# EAGLE board apex (EAGLE 5.09), part 1 of 2
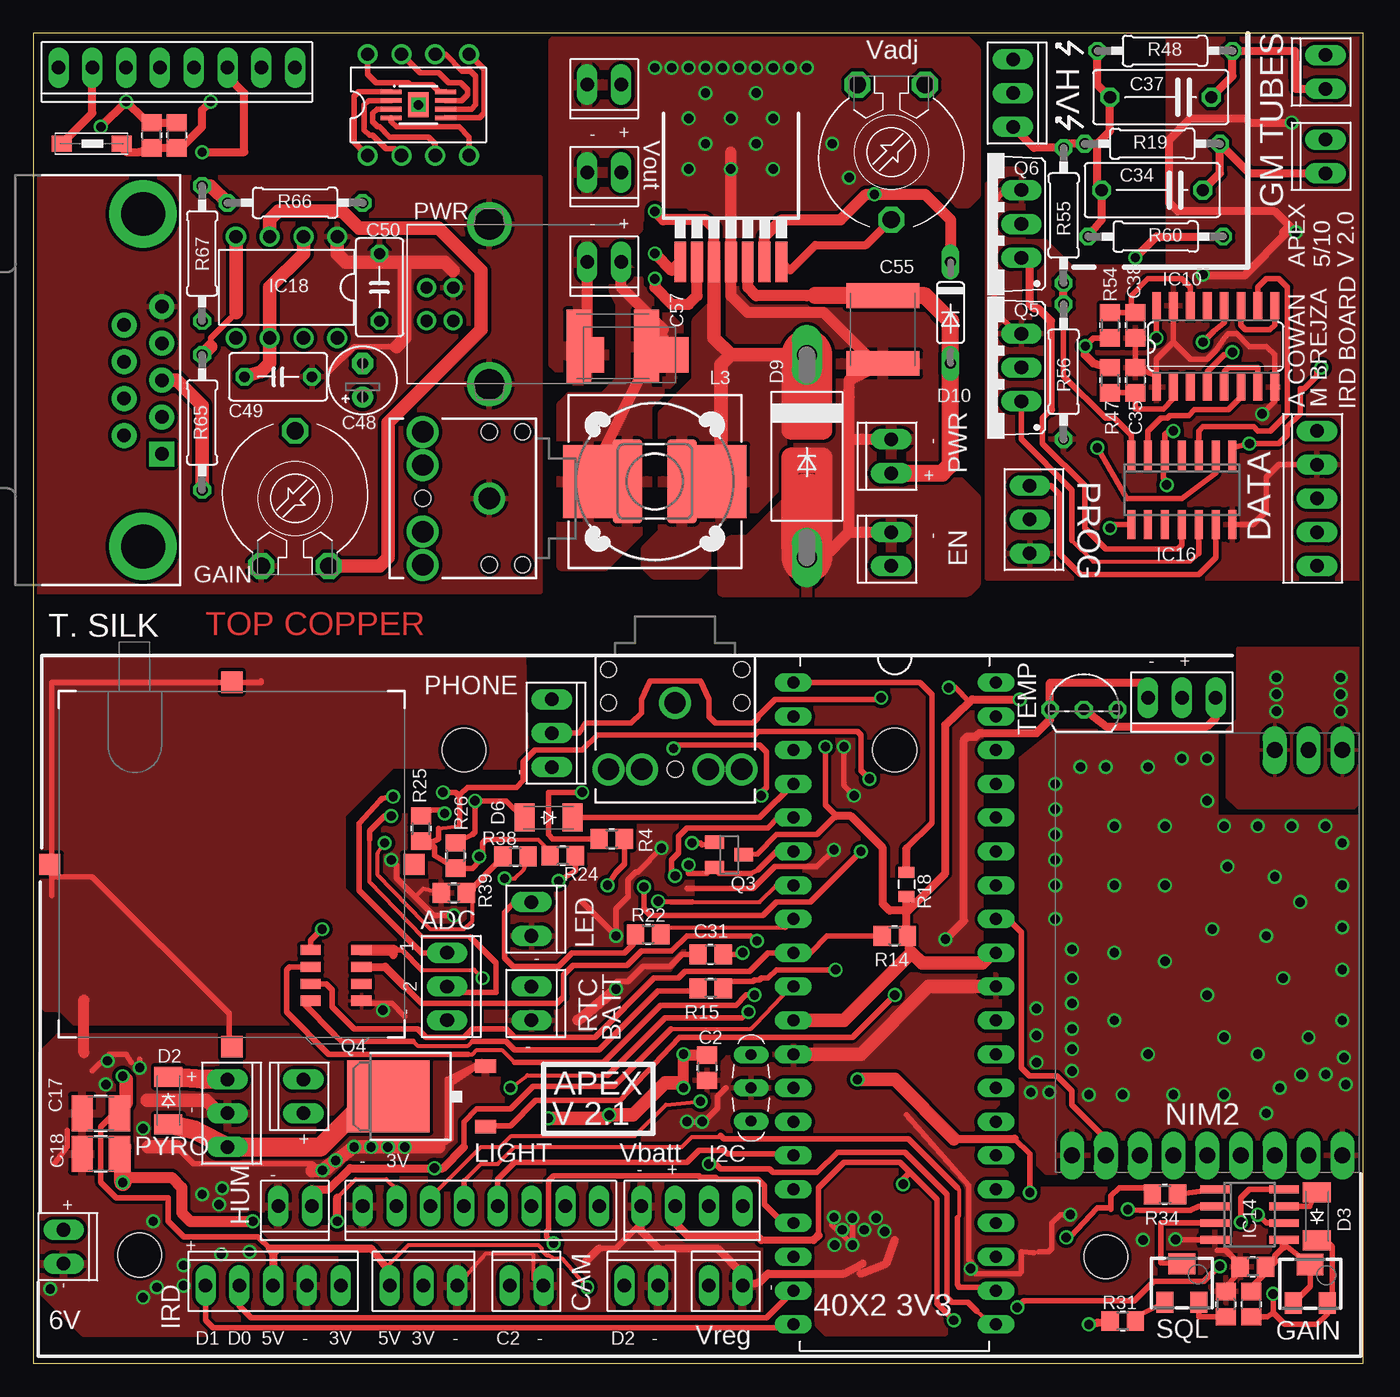
[diagram p0: board, top side]
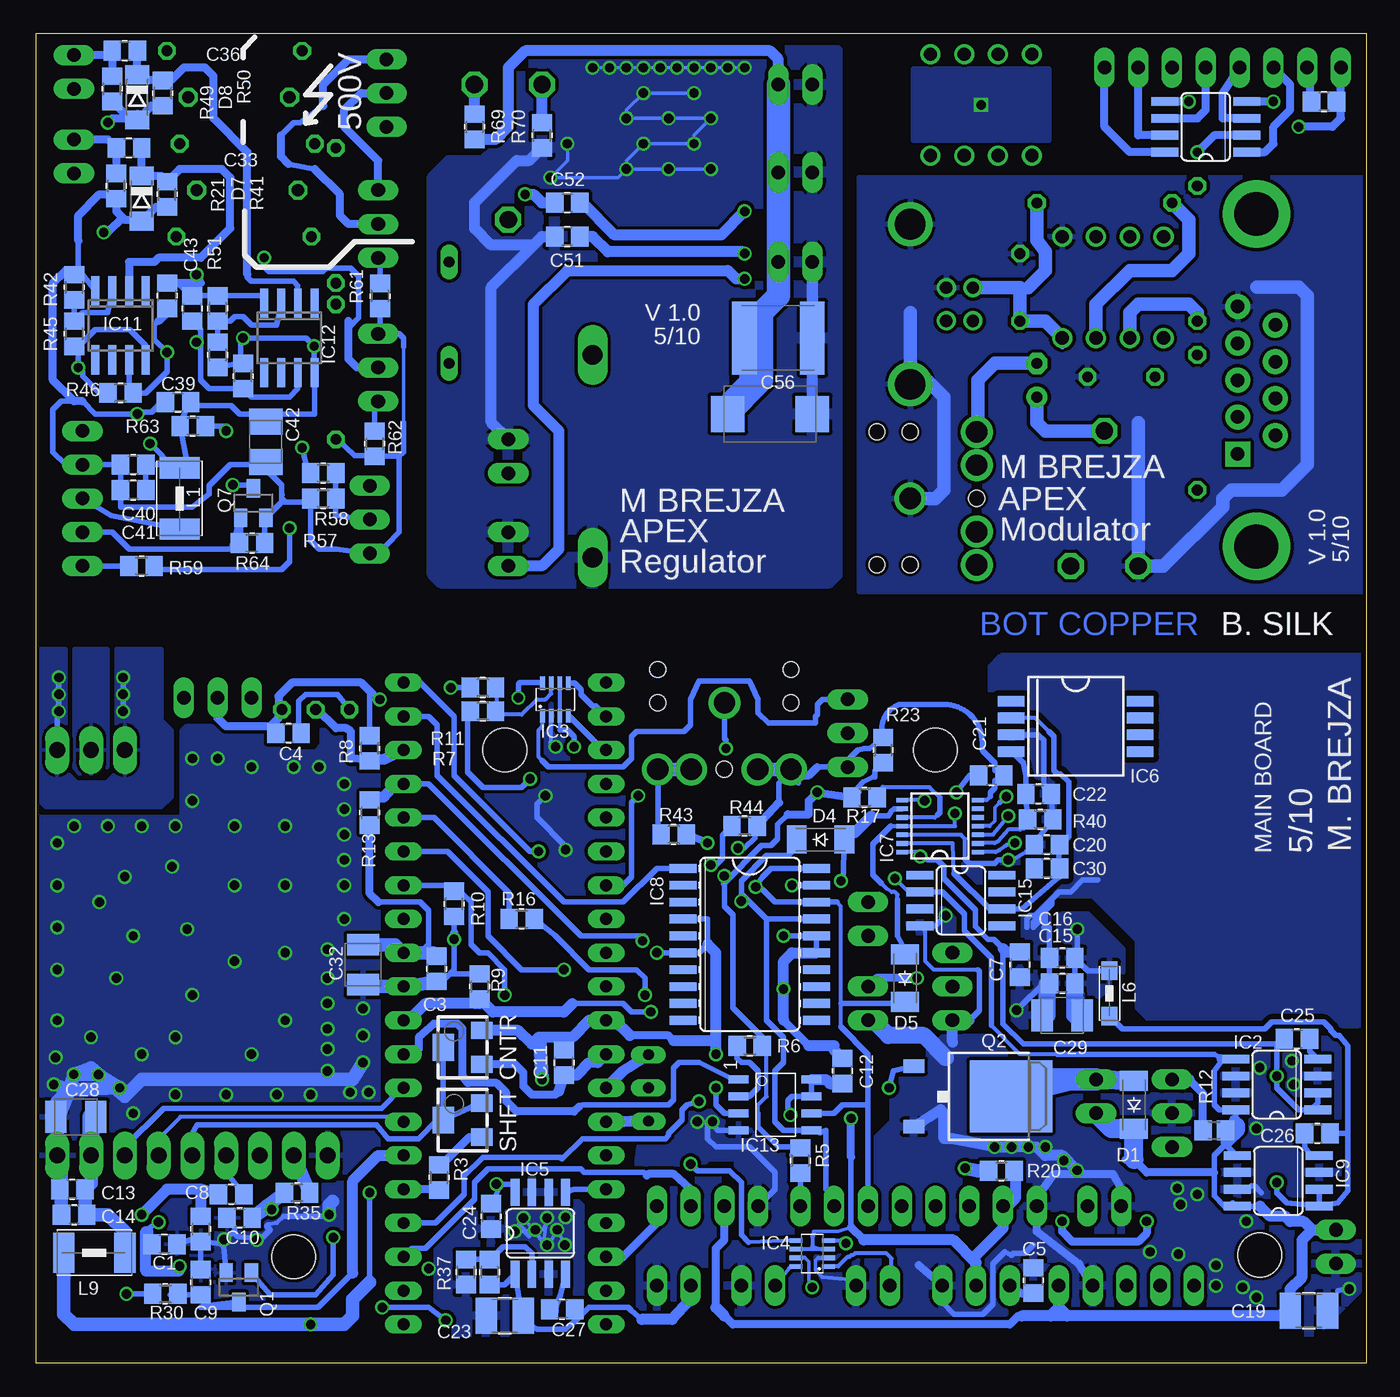
[diagram p1: board, bottom side, seen from below]

Size 100 x 100 mm. Coordinates in mm from the lower left corner, seen from the top.
Outline: 0,0 100,0 100,100 0,100 0,0
Copper layers (1*16): Top 0.035mm / dielectric 1.5mm / Bottom 0.035mm
Design rules "Fusion_eagle_rule_v1.1 *": minimum track width 6mil, minimum drill 12mil, track to track 8mil, track to pad 8mil, pad to pad 8mil, via to via 8mil, smd to smd 0mil, copper to edge 10mil, drill to drill 10mil, minimum pad ring 10mil, minimum via ring 6mil, stop-mask expansion 2mil, vias tented up to drill 30mil, thermal gap 10mil
Holes 3.3 mm at 32.38,46.1 64.77,46.1 80.64,8 8,8.13

## Footprints (pad centres in the part's own frame; a part is rotated, then mirrored left to right if it is on the bottom)
C0805 = smd 1.3 x 1.5: 1 -0.95,0; 2 0.95,0
C1210 = smd 1.6 x 2.7: 1 -1.4,0; 2 1.4,0
SMC_B = smd 1.6 x 2.4: + -1.5,0; - 1.5,0
C075-042X103 = drill 0.914 octagon: 1 -3.81,0; 2 3.81,0
B/3528-21R = smd 1.95 x 2.5: + 1.525,0; - -1.525,0
E2,5-5 = drill 0.813 pad 1.6 round: + -1.27,0 | drill 0.813 pad 1.6 octagon: - 1.27,0
C050-035X075 = drill 0.813 octagon: 1 -2.54,0; 2 2.54,0
C2220K = smd 1.85 x 5.5: 1 -2.55,0; 2 2.55,0
D/7343-31R = smd 2.55 x 2.7: + 3.175,0; - -3.175,0
SOD-123_MINI-SMA = smd 1.5 x 2.1: A 1.8,0; C -1.8,0
SOD80C = smd 1.4 x 1.8: A 1.7,0; C -1.7,0
C2673 = drill 1.499 long: A 7.62,0; C -7.62,0
DO35-7 = drill 0.813 long: A 3.81,0; C -3.81,0
MSOP8 = smd 0.35 x 1.6: 1 -0.975,-2.05; 2 -0.325,-2.05; 3 0.325,-2.05; 4 0.975,-2.05; 5 0.975,2.05; 6 0.325,2.05; 7 -0.325,2.05; 8 -0.975,2.05 | smd 1.89 x 1.57: EXP 0,0
TO92- = drill 0.813 octagon: 1 -2.54,0; 2 0,0; 3 2.54,0
SO08 = smd 0.66 x 2.032: 1 -1.905,-3.073; 2 -0.635,-3.073; 3 0.635,-3.073; 4 1.905,-3.073; 5 1.905,3.073; 6 0.635,3.073; 7 -0.635,3.073; 8 -1.905,3.073
SOT23-8L = smd 0.35 x 1: 1 -0.975,-1.225; 2 -0.325,-1.225; 3 0.325,-1.225; 4 0.975,-1.225; 5 0.975,1.225; 6 0.325,1.225; 7 -0.325,1.225; 8 -0.975,1.225
SO8-7_5 = smd 0.8 x 2: 1 -1.905,-4.845; 2 -0.635,-4.845; 3 0.635,-4.845; 4 1.905,-4.845; 5 1.905,4.845; 6 0.635,4.845; 7 -0.635,4.845; 8 -1.905,4.845
TSSOP14 = smd 0.9 x 0.35: 1 -2.875,1.95; 2 -2.875,1.3; 3 -2.875,0.65; 4 -2.875,0; 5 -2.875,-0.65; 6 -2.875,-1.3; 7 -2.875,-1.95; 8 2.825,-1.95; 9 2.825,-1.3; 10 2.825,-0.65; 11 2.825,0; 12 2.825,0.65; 13 2.825,1.3; 14 2.825,1.95
SO20W = smd 0.66 x 2.032: 1 -5.715,-5.029; 2 -4.445,-5.029; 3 -3.175,-5.029; 4 -1.905,-5.029; 5 -0.635,-5.029; 6 0.635,-5.029; 7 1.905,-5.029; 8 3.175,-5.029; 9 4.445,-5.029; 10 5.715,-5.029; 11 5.715,5.029; 12 4.445,5.029; 13 3.175,5.029; 14 1.905,5.029; 15 0.635,5.029; 16 -0.635,5.029; 17 -1.905,5.029; 18 -3.175,5.029; 19 -4.445,5.029; 20 -5.715,5.029
SO16 = smd 0.66 x 2.032: 1 -4.445,-3.073; 2 -3.175,-3.073; 3 -1.905,-3.073; 4 -0.635,-3.073; 5 0.635,-3.073; 6 1.905,-3.073; 7 3.175,-3.073; 8 4.445,-3.073; 9 4.445,3.073; 10 3.175,3.073; 11 1.905,3.073; 12 0.635,3.073; 13 -0.635,3.073; 14 -1.905,3.073; 15 -3.175,3.073; 16 -4.445,3.073
SO08' = smd 0.6 x 2.2: 1 -1.905,-2.6; 2 -0.635,-2.6; 3 0.635,-2.6; 4 1.905,-2.6; 5 1.905,2.6; 6 0.635,2.6; 7 -0.635,2.6; 8 -1.905,2.6
SO8 = smd 0.61 x 1.524: 1 -1.27,-2.743; 2 0,-2.743; 3 1.27,-2.743; 4 2.54,-2.743; 5 2.54,2.743; 6 1.27,2.743; 7 0,2.743; 8 -1.27,2.743
SO-14 = smd 0.6 x 2.2: 1 -3.81,-2.6; 2 -2.54,-2.6; 3 -1.27,-2.6; 4 0,-2.6; 5 1.27,-2.6; 6 2.54,-2.6; 7 3.81,-2.6; 8 3.81,2.6; 9 2.54,2.6; 10 1.27,2.6; 11 0,2.6; 12 -1.27,2.6; 13 -2.54,2.6; 14 -3.81,2.6
DIL08 = drill 1 round: 1 -3.81,-3.81; 2 -1.27,-3.81; 3 1.27,-3.81; 4 3.81,-3.81; 5 3.81,3.81; 6 1.27,3.81; 7 -1.27,3.81; 8 -3.81,3.81
DDPACK-7 = smd 0.889 x 3.048: 1 -3.81,-8.255; 2 -2.54,-8.255; 3 -1.27,-8.255; 4 0,-8.255; 5 1.27,-8.255; 6 2.54,-8.255; 7 3.81,-8.255
10X08MTA = drill 1.016 long: 1 8.89,0; 2 6.35,0; 3 3.81,0; 4 1.27,0; 5 -1.27,0; 6 -3.81,0; 7 -6.35,0; 8 -8.89,0
10X05MTA = drill 1.016 long: 1 5.08,0; 2 2.54,0; 3 0,0; 4 -2.54,0; 5 -5.08,0
10X03MTA = drill 1.016 long: 1 2.54,0; 2 0,0; 3 -2.54,0
10X02MTA = drill 1.016 long: 1 1.27,0; 2 -1.27,0
10X04MTA = drill 1.016 long: 1 3.81,0; 2 1.27,0; 3 -1.27,0; 4 -3.81,0
1812 = smd 1.6 x 3: 1 -2.3,0; 2 2.3,0
1806 = smd 1.5 x 1.2: 1 -2.3,0; 2 2.2,0
POWER-CHOKE_WE-TPC = smd 6.3 x 2.2: 1 0,2.05; 2 0,-2.05
DR127 = smd 3.85 x 5.5: 1 -4.975,0; 2 4.975,0
1210 = smd 1.4 x 1.2: 1 -1.7,0; 2 1.7,0
DIL40 = drill 0.9 long: 1 -21.59,-8.89; 2 -19.05,-8.89; 3 -16.51,-8.89; 4 -13.97,-8.89; 5 -11.43,-8.89; 6 -8.89,-8.89; 7 -6.35,-8.89; 8 -3.81,-8.89; 9 -1.27,-8.89; 10 1.27,-8.89; 11 3.81,-8.89; 12 6.35,-8.89; 13 8.89,-8.89; 14 11.43,-8.89; 15 13.97,-8.89; 16 16.51,-8.89; 17 19.05,-8.89; 18 21.59,-8.89; 19 24.13,-8.89; 20 26.67,-8.89; 21 26.67,6.35; 22 24.13,6.35; 23 21.59,6.35; 24 19.05,6.35; 25 16.51,6.35; 26 13.97,6.35; 27 11.43,6.35; 28 8.89,6.35; 29 6.35,6.35; 30 3.81,6.35; 31 1.27,6.35; 32 -1.27,6.35; 33 -3.81,6.35; 34 -6.35,6.35; 35 -8.89,6.35; 36 -11.43,6.35; 37 -13.97,6.35; 38 -16.51,6.35; 39 -19.05,6.35; 40 -21.59,6.35
SOT23 = smd 1 x 1.4: 1 -0.95,-1.1; 2 0.95,-1.1; 3 0,1.1
DPACK_1 = smd 1 x 1.6: B -2.28,-4.8; E 2.28,-4.8 | smd 5.4 x 6.2: C 0,2.5
TO220BV = drill 1.016 long: D 0,-2.54; G -2.54,-2.54; S 2.54,-2.54
RTRIM3214W = smd 1.3 x 1.6: 1 -1.275,-1.45; 3 1.275,-1.45 | smd 2 x 1.6: 2 0,1.45
R0805 = smd 1.3 x 1.5: 1 -0.95,0; 2 0.95,0
R0805' = smd 1.3 x 1.5: 1 -0.85,0; 2 0.85,0
0805 = smd 0.8 x 1.2: 1 -0.9,0; 2 0.9,0
0207/10 = drill 0.813 octagon: 1 -5.08,0; 2 5.08,0
PT-10 = drill 1.3 octagon: 1 -2.54,-5.08; 2 2.54,-5.08; 3 0,5.08
LASSEN_IQ_GPS = smd 0.762 x 1.524: 1 2.752,7.076; 2 2.752,3.266; 3 4.022,7.076; 4 4.022,3.266; 5 5.292,7.076; 6 5.292,3.266; 7 6.562,7.076; 8 6.562,3.266 | smd 1.6 x 1.6: GND1 -0.7,13; GND2 13,26.7; GND3 26.7,13; GND4 13,-0.7
CSTLS_G8 = drill 0.813 long: 1 -2.5,0; 2 0,0; 3 2.5,0
AUDIO-JACK = drill 1.6 round: 1 0,0; 2 5,5; 3 5,2.5; 4 5,-2.5; 5 5,-5 | hole 1.2: 0,5; -2.5,5; -2.5,-5; 0,-5; 5,0
NIM2PK = drill 1.2 long: 1 -15.24,5.08; 2 -15.24,2.54; 3 -15.24,0; 10 15.24,-15.24; 11 15.24,-12.7; 12 15.24,-10.16; 13 15.24,-7.62; 14 15.24,-5.08; 15 15.24,-2.54; 16 15.24,0; 17 15.24,2.54; 18 15.24,5.08
DB9 = drill 1.016 pad 1.88 square: 1 -5.54,-1.42 | drill 1.016 pad 1.88 round: 2 -2.77,-1.42; 3 0,-1.42; 4 2.77,-1.42; 5 5.54,-1.42; 6 -4.15,1.42; 7 -1.38,1.42; 8 1.38,1.42; 9 4.15,1.42 | drill 3.302 pad 5.08 round: G1 -12.5,0; G2 12.5,0
85-32004-10X = drill 0.92 pad 1.27 round: 1 4.71,-1.25; 2 4.71,1.25; 3 2.71,1.25; 4 2.71,-1.25 | drill 2.3 pad 3 round: M1 0,6.02; M2 0,-6.02

## Placement (x,y rotation side)
C1  100n  [C0805]  90.36,8.95 180 bottom
C2  100n  [C0805]  50.67,22.23 90 top
C3  100n  [C0805]  69.91,29.65 90 bottom
C4  100n  [C0805]  81.03,47.37 180 bottom
C5  100n  [C0805]  25.02,6.22 270 bottom
C6  47n  [C0805]  91.57,4.45 270 top
C7  100n  [C0805]  26.04,29.97 90 bottom
C8  47n  [C0805]  85.34,12.7 0 bottom
C9  47n  [C0805]  87.63,6.1 270 bottom
C10  47n  [C0805]  84.71,10.92 0 bottom
C11  100n  [C0805]  60.33,22.61 90 bottom
C12  100n  [C0805]  39.37,21.97 270 bottom
C13  100n  [C0805]  97.28,13.08 0 bottom
C14  100p  [C0805]  97.16,11.18 0 bottom
C15  100n  [C0805]  22.86,28.57 0 bottom
C16  100p  [C0805]  22.86,30.48 0 bottom
C17  [C1210]  5.08,18.8 180 top
C18  22u  [C1210]  5.08,15.75 180 top
C19  [C1210]  4.32,3.94 0 bottom
C20  [C0805]  24,38.99 180 bottom
C21  [C0805]  28.19,44.2 0 bottom
C22  47p  [C0805]  24.64,42.8 0 bottom
C23  22u  [C1210]  64.77,3.56 180 bottom
C24  1u  [C0805]  65.79,11.05 90 bottom
C25  10n  [C0805]  5.21,24.38 0 bottom
C26  10n  [C0805]  3.68,17.27 180 bottom
C27  10n  [C0805]  60.45,4.06 180 bottom
C28  [SMC_B]  97.03,18.54 180 bottom
C29  [SMC_B]  22.86,26.16 180 bottom
C30  10n  [C0805]  24,37.21 0 bottom
C31  100n  [C0805]  50.93,30.73 0 top
C32  [SMC_B]  75.44,29.97 270 bottom
C33  [C0805]  93.03,91.38 0 bottom
C34  [C075-042X103]  84.14,88.2 180 top
C35  [C0805]  82.87,73.91 90 top
C36  [C0805]  93.34,98.68 0 bottom
C37  [C075-042X103]  84.77,95.19 180 top
C38  [C0805]  82.87,78.04 270 top
C39  [C0805]  89.34,72.26 0 bottom
C40  [C0805]  92.71,67.56 0 bottom
C41  [C0805]  92.71,65.66 0 bottom
C42  [B/3528-21R]  82.74,69.28 90 bottom
C43  [C0805]  88.27,79.31 270 bottom
C44  [C0805]  90.17,80.26 270 bottom
C45  [C0805]  8.89,92.33 90 top
C46  [C0805]  10.79,92.33 90 top
C47  [C0805]  3.17,94.87 0 bottom
C48  [E2,5-5]  24.77,73.91 90 top
C49  [C050-035X075]  18.41,74.17 180 top
C50  [C050-035X075]  26.04,80.9 270 top
C51  [C0805]  60.07,84.71 180 bottom
C52  [C0805]  60.07,87.25 0 bottom
C53  [C2220K]  44.2,77.09 0 bottom
C54  [C2220K]  43.56,76.45 180 top
C55  [C2220K]  63.88,77.72 270 top
C56  [D/7343-31R]  44.83,71.37 180 bottom
C57  [D/7343-31R]  44.83,75.82 0 top
D1  CGRM4002-G  [SOD-123_MINI-SMA]  17.46,19.43 90 bottom
D2  CGRM4002-G  [SOD-123_MINI-SMA]  10.16,19.75 270 top
D3  CGRM4002-G  [SOD-123_MINI-SMA]  96.52,11.05 90 top
D4  CGRM4002-G  [SOD-123_MINI-SMA]  41.02,39.37 0 bottom
D5  CGRM4002-G  [SOD-123_MINI-SMA]  34.67,28.96 90 bottom
D6  CGRM4002-G  [SOD-123_MINI-SMA]  38.73,41.02 180 top
D7  PMLL4150  [SOD80C]  92.08,87.57 270 bottom
D8  PMLL4150  [SOD80C]  92.39,95.19 270 bottom
D9  MBRS130LT3  [C2673]  58.17,68.2 270 top
D10  1N4148DO35-7  [DO35-7]  68.96,78.99 270 top
E$1  [MSOP8]  28.96,94.61 270 top
IC1  DS18B20  [TO92-]  78.99,49.15 0 top
IC2  LT1763  [SO08]  6.73,20.95 90 bottom
IC3  MAX3373E  [SOT23-8L]  60.96,49.91 0 bottom
IC4  MAX3373E  [SOT23-8L]  41.66,8.26 90 bottom
IC5  LT1763  [SO08]  62.1,9.78 0 bottom
IC6  MPX6115  [SO8-7_5]  21.84,47.88 270 bottom
IC7  MCP3204  [TSSOP14]  32.07,40.39 180 bottom
IC8  DS3234  [SO20W]  46.35,31.5 270 bottom
IC9  LT1763  [SO08]  6.6,13.72 90 bottom
IC10  4528D  [SO16]  88.9,76.45 0 top
IC11  LM311D  [SO08']  93.66,78.04 180 bottom
IC12  LM311D  [SO08']  80.96,77.09 180 bottom
IC13  FM25-S  [SO8]  44.45,20.07 270 bottom
IC14  CA3240ED  [SO08']  91.44,11.18 270 top
IC15  MAX6133  [SO08]  30.48,34.8 270 bottom
IC16  PICAXE-14MSO  [SO-14]  86.36,65.66 180 top
IC17  TCS230  [SO08]  12.06,92.96 90 bottom
IC18  NE555N  [DIL08]  19.05,80.9 180 top
IC19  LT1959R  [DDPACK-7]  52.45,91.06 0 top
IC20  NE555N  [DIL08]  28.96,94.61 0 top
J1  [10X08MTA]  33.66,11.81 180 top
J2  [10X05MTA]  18.03,5.84 0 top
J3  [10X03MTA]  86.36,50.04 180 top
J4  [10X03MTA]  14.61,18.8 270 top
J5  [10X02MTA]  20.32,20.07 90 top
J6  [10X02MTA]  37.47,27.05 270 top
J7  [10X03MTA]  38.99,47.37 270 top
J8  [10X02MTA]  45.72,5.84 0 top
J9  [10X02MTA]  37.08,5.84 0 top
J10  [10X02MTA]  37.47,33.4 270 top
J11  [10X02MTA]  52.07,5.84 0 top
J12  [10X02MTA]  19.68,11.81 180 top
J13  [10X02MTA]  2.29,8.76 270 top
J14  [10X03MTA]  29.34,5.84 0 top
J15  [10X04MTA]  49.53,11.81 180 top
J16  [10X02MTA]  97.16,90.74 90 top
J17  [10X02MTA]  97.16,97.09 90 top
J18  [10X03MTA]  31.11,28.32 270 top
J19  [10X03MTA]  73.66,95.5 270 top
J20  [10X03MTA]  74.93,63.44 270 top
J21  [10X05MTA]  96.52,65.02 90 top
J22  [10X08MTA]  10.79,97.41 180 top
J24  [10X02MTA]  42.93,89.53 180 top
J25  [10X02MTA]  42.93,82.8 180 top
J26  [10X02MTA]  64.52,68.2 90 top
J27  [10X02MTA]  64.52,61.21 90 top
J28  [10X02MTA]  42.93,96.14 180 top
L1  [1812]  89.22,65.02 270 bottom
L2  [1806]  4.45,91.69 0 top
L3  [POWER-CHOKE_WE-TPC]  46.74,66.29 270 top
L4  DR127  [DR127]  46.74,66.29 180 top
L6  [1210]  19.3,27.81 90 bottom
L9  [1812]  95.63,8.32 180 bottom
PIC1  PICAXE40X2  [DIL40]  66.04,29.59 270 top
Q1  BCX70SMD  [SOT23]  84.77,5.71 180 bottom
Q2  IRF740DPACK  [DPACK_1]  29.21,20.07 270 bottom
Q3  BCX70SMD  [SOT23]  52.32,38.23 270 top
Q4  IRF740DPACK  [DPACK_1]  29.21,20.07 90 top
Q5  IRF512  [TO220BV]  71.75,74.87 90 top
Q6  IRF512  [TO220BV]  71.75,85.66 90 top
Q7  BSS123  [SOT23]  83.67,64.67 0 bottom
R1  100K  [RTRIM3214W]  67.94,23.75 90 bottom
R2  100K  [RTRIM3214W]  67.94,18.29 90 bottom
R3  10K  [R0805]  69.72,13.97 270 bottom
R4  100  [R0805]  43.5,39.43 0 top
R5  100  [R0805]  42.55,15.24 270 bottom
R6  100  [R0805]  46.35,23.88 0 bottom
R7  0  [R0805]  66.42,49.02 180 bottom
R8  4k7  [R0805]  74.93,46.23 90 bottom
R9  100k  [R0805]  66.67,28.32 270 bottom
R10  100k  [R0805]  68.58,34.54 90 bottom
R11  0  [R0805]  66.42,50.8 180 bottom
R12  1k  [R0805']  11.43,17.53 0 bottom
R13  100k  [R0805]  74.93,41.4 270 bottom
R14  100k  [R0805]  64.77,32.13 0 top
R15  1k  [R0805]  50.93,28.19 180 top
R16  1k  [R0805]  63.5,33.4 0 bottom
R17  51k  [R0805]  37.72,42.55 0 bottom
R18  10K  [0805]  65.66,36 270 top
R19  [0207/10]  84.14,91.69 180 top
R20  22K  [R0805]  27.43,14.48 0 bottom
R21  [R0805]  93.98,88.52 90 bottom
R22  1k  [R0805]  46.23,32.26 0 top
R23  33k  [R0805]  36.32,46.1 270 bottom
R24  10k  [R0805]  39.81,38.16 180 top
R25  10k  [R0805]  29.15,40.2 270 top
R26  10k  [R0805]  31.75,38.16 270 top
R27  100K  [RTRIM3214W]  96.01,5.97 0 top
R28  1K5  [R0805]  87.63,10.1 270 bottom
R29  1K  [R0805]  91.69,7.24 180 top
R30  10K  [R0805]  90.3,5.21 180 bottom
R31  10K  [R0805]  81.92,3.17 180 top
R32  10K  [R0805]  89.66,4.45 270 top
R33  100K  [RTRIM3214W]  86.36,6.03 0 top
R34  4K7  [R0805]  85.09,12.7 0 top
R35  10K  [R0805]  80.39,12.83 180 bottom
R36  22K  [R0805]  65.91,6.86 270 bottom
R37  22K  [R0805]  67.69,6.86 90 bottom
R38  4K7  [R0805]  36.26,38.1 0 top
R39  4K7  [R0805]  31.62,35.37 0 top
R40  51K  [R0805]  24.51,40.89 0 bottom
R41  [R0805]  90.17,87.88 90 bottom
R42  [R0805]  97.16,80.9 270 bottom
R43  10K  [R0805]  52.07,39.75 180 bottom
R44  10K  [R0805]  46.74,40.39 180 bottom
R45  [R0805]  97.16,77.41 270 bottom
R46  [R0805]  93.66,72.96 180 bottom
R47  [R0805]  80.96,73.91 90 top
R48  [0207/10]  85.09,98.68 180 top
R49  [R0805]  94.3,95.82 90 bottom
R50  [R0805]  90.49,95.5 90 bottom
R51  [R0805]  86.36,79.31 270 bottom
R52  [R0805]  86.36,75.82 270 bottom
R53  [R0805]  84.45,74.23 90 bottom
R54  [R0805]  80.96,78.04 270 top
R55  [0207/10]  77.47,86.3 90 top
R56  [0207/10]  77.47,74.55 90 top
R57  [R0805]  78.42,65.02 0 bottom
R58  [R0805]  78.42,66.93 0 bottom
R59  [R0805]  92.08,59.94 0 bottom
R60  [0207/10]  84.39,84.71 180 top
R61  [R0805]  74.16,80.24 270 bottom
R62  [R0805]  74.56,69.14 270 bottom
R63  [R0805]  88.22,70.45 0 bottom
R64  [R0805]  83.77,61.67 0 bottom
R65  1K  [0207/10]  12.7,70.74 270 top
R66  [0207/10]  19.68,87.25 180 top
R67  [0207/10]  12.7,83.44 270 top
R68  [PT-10]  19.68,65.02 0 top
R69  [R0805]  67.06,92.96 270 bottom
R70  [R0805]  61.98,92.33 90 bottom
R71  [PT-10]  64.52,91.06 180 top
U$1  LASSEN_IQ_GPSLASSEN  [LASSEN_IQ_GPS]  27.94,24.51 90 top
U$2  RESONATOR_4M  [CSTLS_G8]  53.98,20.7 270 top
U$3  AUDIO-JACK2  [AUDIO-JACK]  48.26,49.66 270 top
U$4  AUDIO-JACKPTH  [AUDIO-JACK]  34.29,65.02 180 top
X1  NIM2  [NIM2PK]  93.34,30.86 270 top
X2  [DB9]  8.26,73.91 90 top
X3  MINI-USB_SHIELD4P-85-32004-10X  [85-32004-10X]  34.29,79.63 180 top

## Library data of the parts
C1-C57 L3 R3-R11 R13-R17 R19-R26 R28-R32 R34-R71 = rcl
D1-D10 = diode
E$1 IC2-IC9 IC15-IC17 IC19 PIC1 Q2 Q4 U$2 X1 = Mine
IC1 = 1wire
IC10 = 45xx
IC11 IC12 IC14 IC18 IC20 = linear
IC13 = ramtron-2
J1-J22 J24-J28 = con-amp
L1 L2 L6 L9 = wuerth-elektronik
L4 = inductors
Q1 Q3 = transistor-npn
Q5 Q6 = transistor-power
Q7 = transistor-small-signal
R1 R2 R12 R27 R33 = resistor
R18 U$1 U$3 U$4 X2 = SparkFun
X3 = con-cypressindustries

## Nets
1WIRE: IC1.2 J3.3 PIC1.38 R8.1
+3V3: C2.2 C3.2 C4.2 C11.2 C12.2 C18.1 C26.1 C31.2 C32.+ IC1.3 IC3.3 IC3.6 IC4.3 IC4.6 IC8.4 IC8.6 IC9.1 IC9.2 IC13.3 IC13.7 IC13.8 J1.2 J3.2 J14.2 L6.1 L9.2 PIC1.11 PIC1.32 Q3.3 R1.3 R8.2 R11.2 R13.2 R14.2 R18.2 R20.2 R31.2
+5V: C5.2 C7.2 C17.1 C21.1 C25.1 IC2.1 IC2.2 IC4.7 IC7.14 J2.3 J14.3 R7.2 R24.2 R25.2 R26.2
+5V1: C39.2 C40.2 C41.2 C42.+ IC10.16 IC11.8 IC12.8 IC16.1 L1.1 R45.2 R46.2 R47.2 R52.2 R53.2 R54.2 R63.1
+12V: C1.2 C19.1 C24.2 D1.C IC2.5 IC2.8 IC5.8 IC9.5 IC9.8 IC14.8 IC15.2 J2.1 J5.2 J13.2 J15.2 R12.2 R38.2
+500V: C34.2 C37.2 J19.1 R19.2 R48.2 R55.2 R60.2
ADCCS: D6.C PIC1.4
AGND: C45.2 C46.2 C47.2 IC17.4 J22.1
AUX1: J15.4 PIC1.18
AUX2: J15.3 PIC1.23
CHDK1: IC4.5 PIC1.21
CHDK2: IC4.4 PIC1.17
CLK: D5.C IC8.18 IC8.20 IC13.6 J1.6 PIC1.40
DDV: D6.A IC7.8 R26.1
GND: C1.1 C2.1 C3.1 C4.1 C5.1 C7.1 C9.1 C10.1 C11.1 C12.1 C13.1 C14.1 C15.1 C16.1 C17.2 C18.2 C19.2 C20.2 C21.2 C22.2 C23.2 C24.1 C28.- C29.- C31.1 C32.- IC1.1 IC2.3 IC2.6 IC2.7 IC3.2 IC4.2 IC5.3 IC5.6 IC5.7 IC6.3 IC7.7 IC7.12 IC8.15 IC8.16 IC9.3 IC9.6 IC9.7 IC13.4 IC14.4 IC15.4 J1.1 J2.2 J3.1 J4.2 J6.1 J7.1 J8.1 J9.1 J10.1 J11.1 J12.1 J13.1 J14.1 J15.1 J18.1 PIC1.12 PIC1.31 Q1.2 Q2.E Q4.E R1.1 R9.1 R10.1 R23.1 R28.2 R29.2 R32.1 R37.1 R39.1 R40.2 R44.1 U$1.2 U$2.2 U$3.4 U$3.5 X1.10 X1.18
GND1: C35.2 C38.2 C39.1 C40.1 C41.1 C42.- C43.1 C44.1 D7.A D8.A IC10.1 IC10.8 IC10.15 IC11.4 IC12.4 IC16.14 J19.2 J20.1 J21.2 Q5.S Q6.S Q7.2 R21.1 R41.1 R42.1 R49.1 R50.1 R51.1 R56.1 R57.1 R61.2 R62.2 R64.2
GND2: C49.1 C50.1 IC18.1 R68.1 U$4.1 X2.5 X3.4 X3.M1 X3.M2
GND3: C51.2 C53.2 C54.2 C55.2 C56.- C57.- D9.A IC19.4 J24.1 J25.1 J26.1 J27.1 J28.1 R70.1
IRD1: J2.4 PIC1.19
IRD2: J2.5 PIC1.20
LED: PIC1.8 R22.2
MEMCS: IC13.1 PIC1.29
MISO: PIC1.5 R4.1 R5.1 R6.2 R17.1 R23.2
MOSI: D4.C IC8.17 IC13.5 J1.7 PIC1.7 U$3.1
N$1: R16.2 U$1.5
N$2: IC8.19 R4.2
N$3: R15.2 U$1.1
N$4: J1.8 R5.2
N$5: IC13.2 R6.1
N$6: IC7.10 R17.2
N$7: IC3.7 R7.1 R11.1
N$8: PIC1.1 R18.1
N$9: PIC1.14 U$2.3
N$10: PIC1.13 U$2.1
N$11: R43.2 U$3.2 U$3.3
N$12: IC4.1 J9.2
N$13: X1.2
N$14: C25.2 IC2.4
N$15: C26.2 IC9.4
N$16: C20.1 C30.2 IC6.2 IC7.13 IC15.6
N$17: IC4.8 J8.2
N$18: R1.2 R2.2 R2.3 X1.14
N$19: J10.2 R22.1
N$20: IC3.8 J7.2
N$21: C30.1
N$22: D5.A IC7.11 R25.1
N$23: IC3.1 J7.3
N$24: D1.A J5.1 Q2.C
N$25: C27.2 IC5.4
N$26: D4.A IC7.9 R24.1
N$27: IC5.2 R36.1 R37.2
N$28: D2.A J4.1 Q4.C
N$29: D2.C J4.3 R12.1
N$30: J6.2 U$1.8
N$31: IC7.3 J18.2
N$32: IC7.4 J18.3
N$33: C23.1 C27.1 IC5.1 J11.2 R36.2
N$34: C22.1 IC6.4 IC7.2 R40.1
N$35: C13.2 C14.2 C28.+ L9.1 X1.17
N$36: IC10.5 IC10.7
N$37: C8.2 X1.13
N$38: C8.1 IC14.6 R28.1
N$39: C6.1 IC14.5 R27.1 R27.2 R29.1
N$40: D3.A IC14.7
N$41: C6.2 D3.C R27.3 R30.2
N$42: R31.1 R33.1
N$43: C15.2 C16.2 C29.+ L6.2 U$1.7
N$44: R32.2 R33.3
N$45: IC14.3 R33.2
N$46: R2.1 R3.1
N$47: Q1.1 R34.1
N$48: IC14.1 R34.2
N$49: C10.2 IC14.2 R35.2
N$50: J12.2 PIC1.10 R20.1
N$51: C34.1 J16.2 R19.1
N$52: C33.1 J16.1 R21.2
N$53: C33.2 D7.C IC11.2 R41.2
N$54: IC11.3 R42.2 R45.1
N$55: C44.2 IC10.4 IC11.7 R46.1
N$56: C35.1 IC10.2 R47.1
N$57: IC10.9 IC10.11
N$58: C37.1 J17.2 R48.1
N$59: C36.1 J17.1 R49.2
N$60: C36.2 D8.C IC12.2 R50.2
N$61: IC12.3 R51.2 R52.1
N$62: C43.2 IC10.12 IC12.7 R53.1
N$63: C38.1 IC10.14 R54.1
N$64: J19.3 Q6.D
N$65: IC16.7 R55.1 R56.2
N$66: J20.2 R57.2 R58.2
N$67: IC16.13 J20.3
N$68: IC16.2 R58.1
N$69: IC7.1 R38.1 R39.2
N$70: IC16.8 R59.2
N$71: J21.4 Q7.1 R64.1
N$72: IC10.10 IC16.3
N$73: IC10.6 IC16.6
N$74: IC16.11 Q6.G R61.1
N$75: Q5.D R60.1
N$76: IC16.12 Q5.G R62.1
N$77: J21.3 L1.2
N$78: Q3.1 R43.1
N$79: J21.5 R59.1
N$80: PIC1.6 Q3.2 R44.2
N$81: IC16.5 Q7.3 R63.2
N$82: IC17.3 J22.4
N$83: IC17.2 J22.6
N$84: C45.1 C46.1 IC17.5 L2.2
N$85: IC17.6 J22.5
N$86: IC17.8 J22.8
N$87: IC17.7 J22.7
N$88: C47.1 J22.2 L2.1
N$89: IC17.1 J22.3
N$90: C50.2 IC18.8 R66.1 X3.1
N$91: IC18.4 R65.1
N$92: R65.2 X2.3
N$93: C48.- U$4.5
N$94: IC18.3 R68.2
N$95: IC18.7 R66.2 R67.1
N$96: C49.2 IC18.2 IC18.6 R67.2
N$97: C48.+ R68.3
N$98: C51.1 IC19.1
N$99: R69.1 R71.1
N$100: R70.2 R71.2
N$101: IC19.7 R71.3
N$102: C52.1 D10.C IC19.6
N$103: C53.1 C54.1 C56.+ C57.+ J24.2 J25.2 J28.2 L3.2 L4.2 R69.2
N$104: IC19.2 J27.2
N$105: C55.1 D10.A IC19.5 J26.2
N$106: C52.2 D9.C IC19.3 L3.1 L4.1
PHONEMISO: IC3.4 PIC1.3
PHONEMOSI: IC3.5 PIC1.2
PHONEPWR: IC5.5 PIC1.16
PYRO1: PIC1.34 Q4.B R10.2
PYRO2: PIC1.30 Q2.B R9.2
RFGND: X1.1 X1.3
RSSI: PIC1.33 R35.1 X1.11
RTCCS: IC8.1 PIC1.39
RXA: PIC1.9 R14.1 U$1.3
RXB: PIC1.37 R13.1 U$1.6
RXD: C9.2 PIC1.26 Q1.3 R30.1
RXSEL: PIC1.28 X1.16
S$1: E$1.1 IC20.1
S$2: E$1.2 IC20.2
S$3: E$1.3 IC20.3
S$4: E$1.4 IC20.4
S$5: E$1.8 IC20.8
S$6: E$1.7 IC20.7
S$7: E$1.6 IC20.6
S$8: E$1.5 IC20.5
S$10: E$1.EXP
TAOS1: J1.3 PIC1.24
TAOS2: J1.4 PIC1.22
TAOS3: J1.5 PIC1.15
TXA: PIC1.35 R15.1
TXB: PIC1.36 R16.1
TXD: PIC1.25 R3.2
TXSEL: PIC1.27 X1.15